# Altium PCB Morpheus_LED.PcbDoc
Units mm, origin at the board's own origin, x right, y up, seen from the top; angles counter-clockwise.
Board outline 53 x 53 mm, 4 copper layers (Component Side, Ground Plane, Power Plane, Solder Side), stack 0.575 mm thick; 57 components, 33 nets, 164 pads, 66 vias.
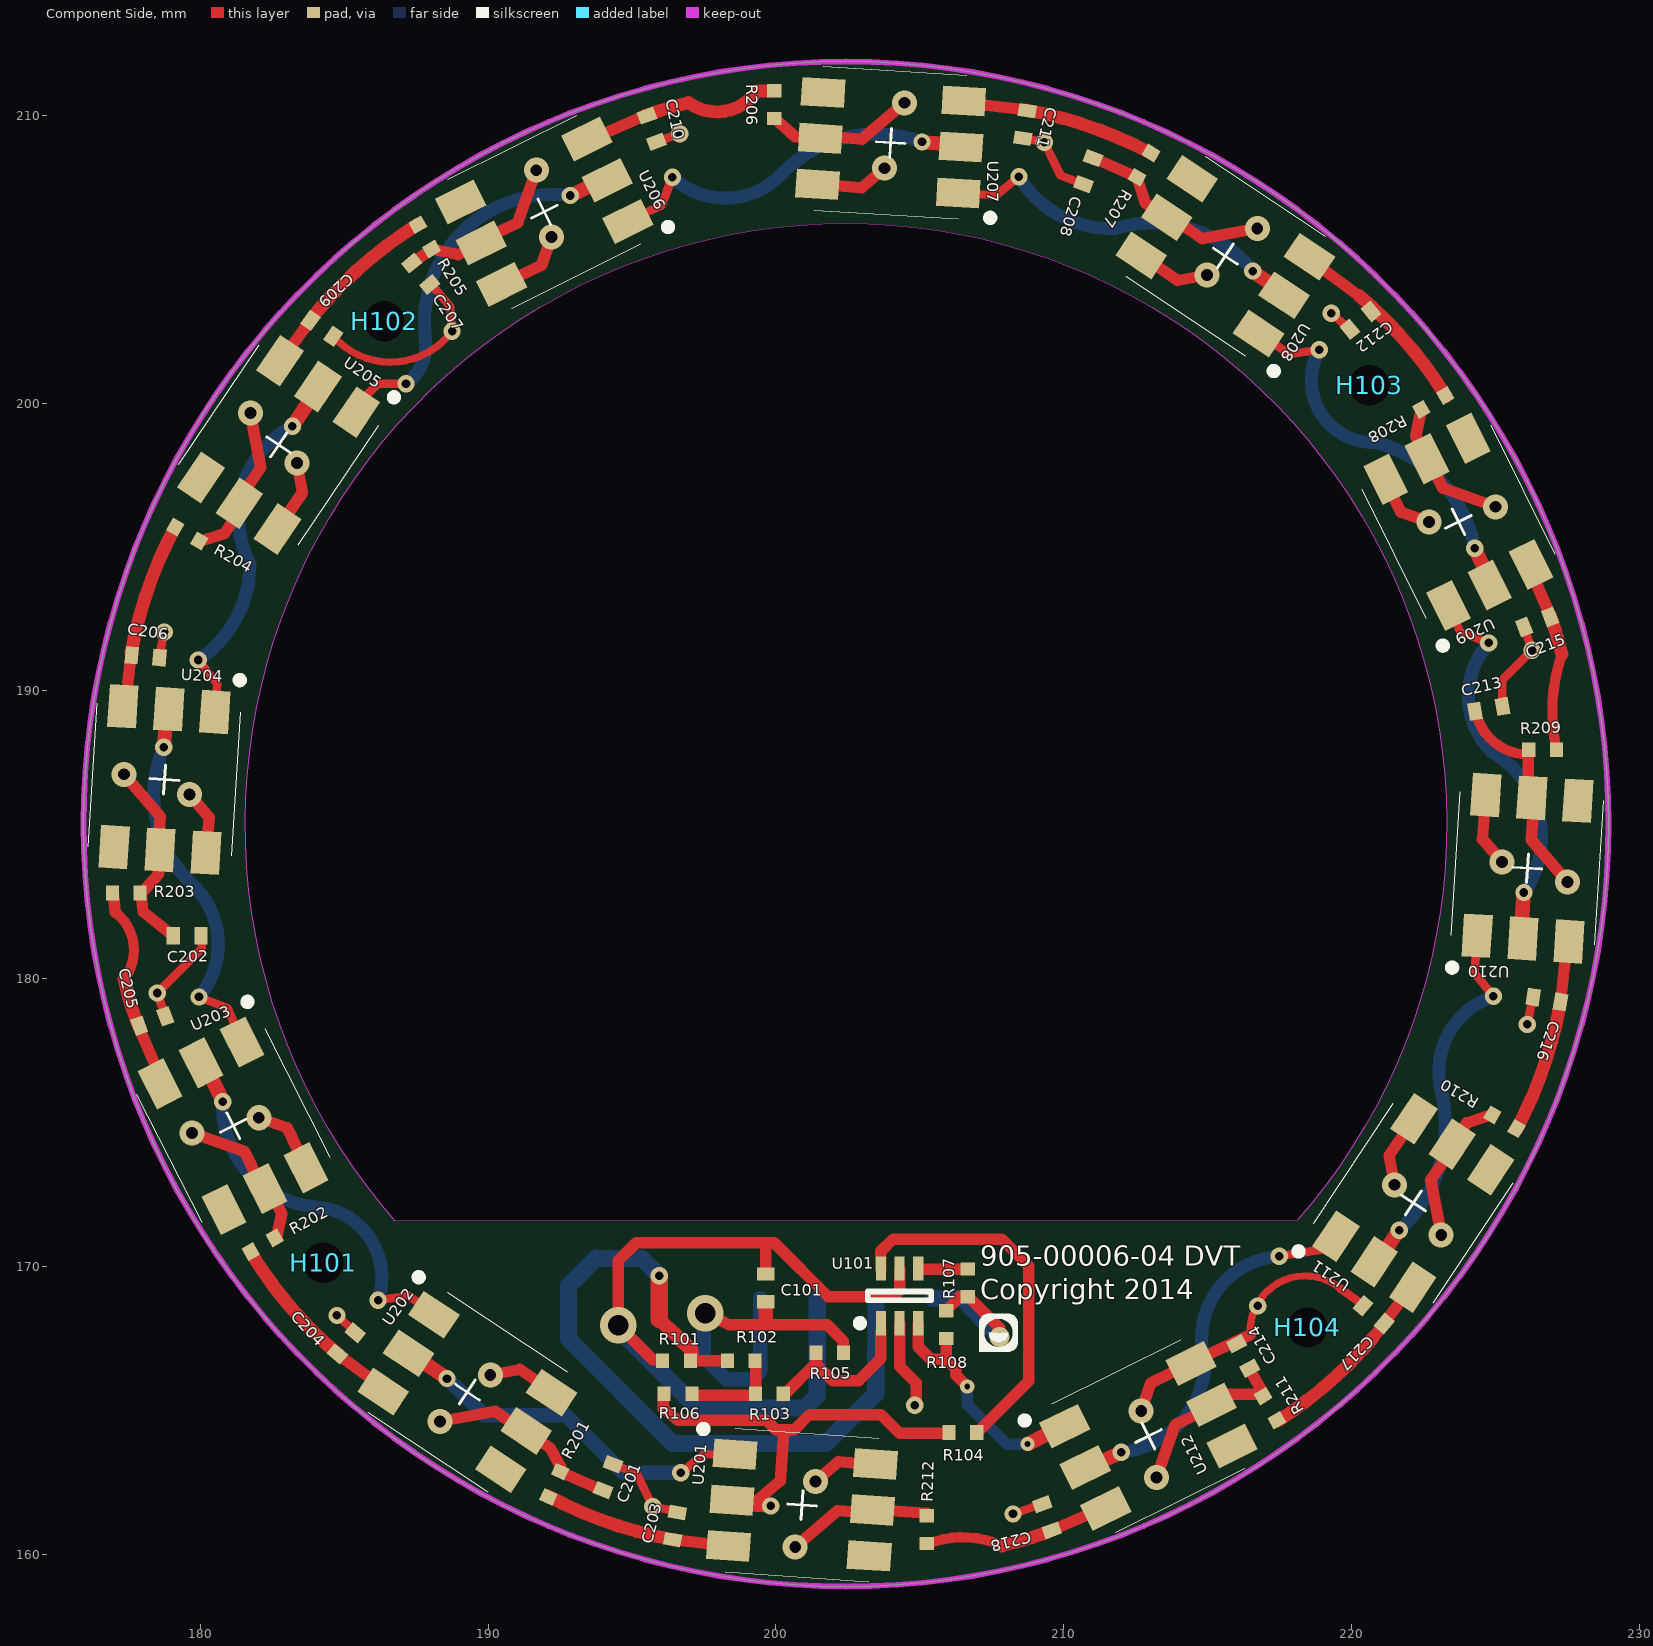
[diagram p0: Component Side view]
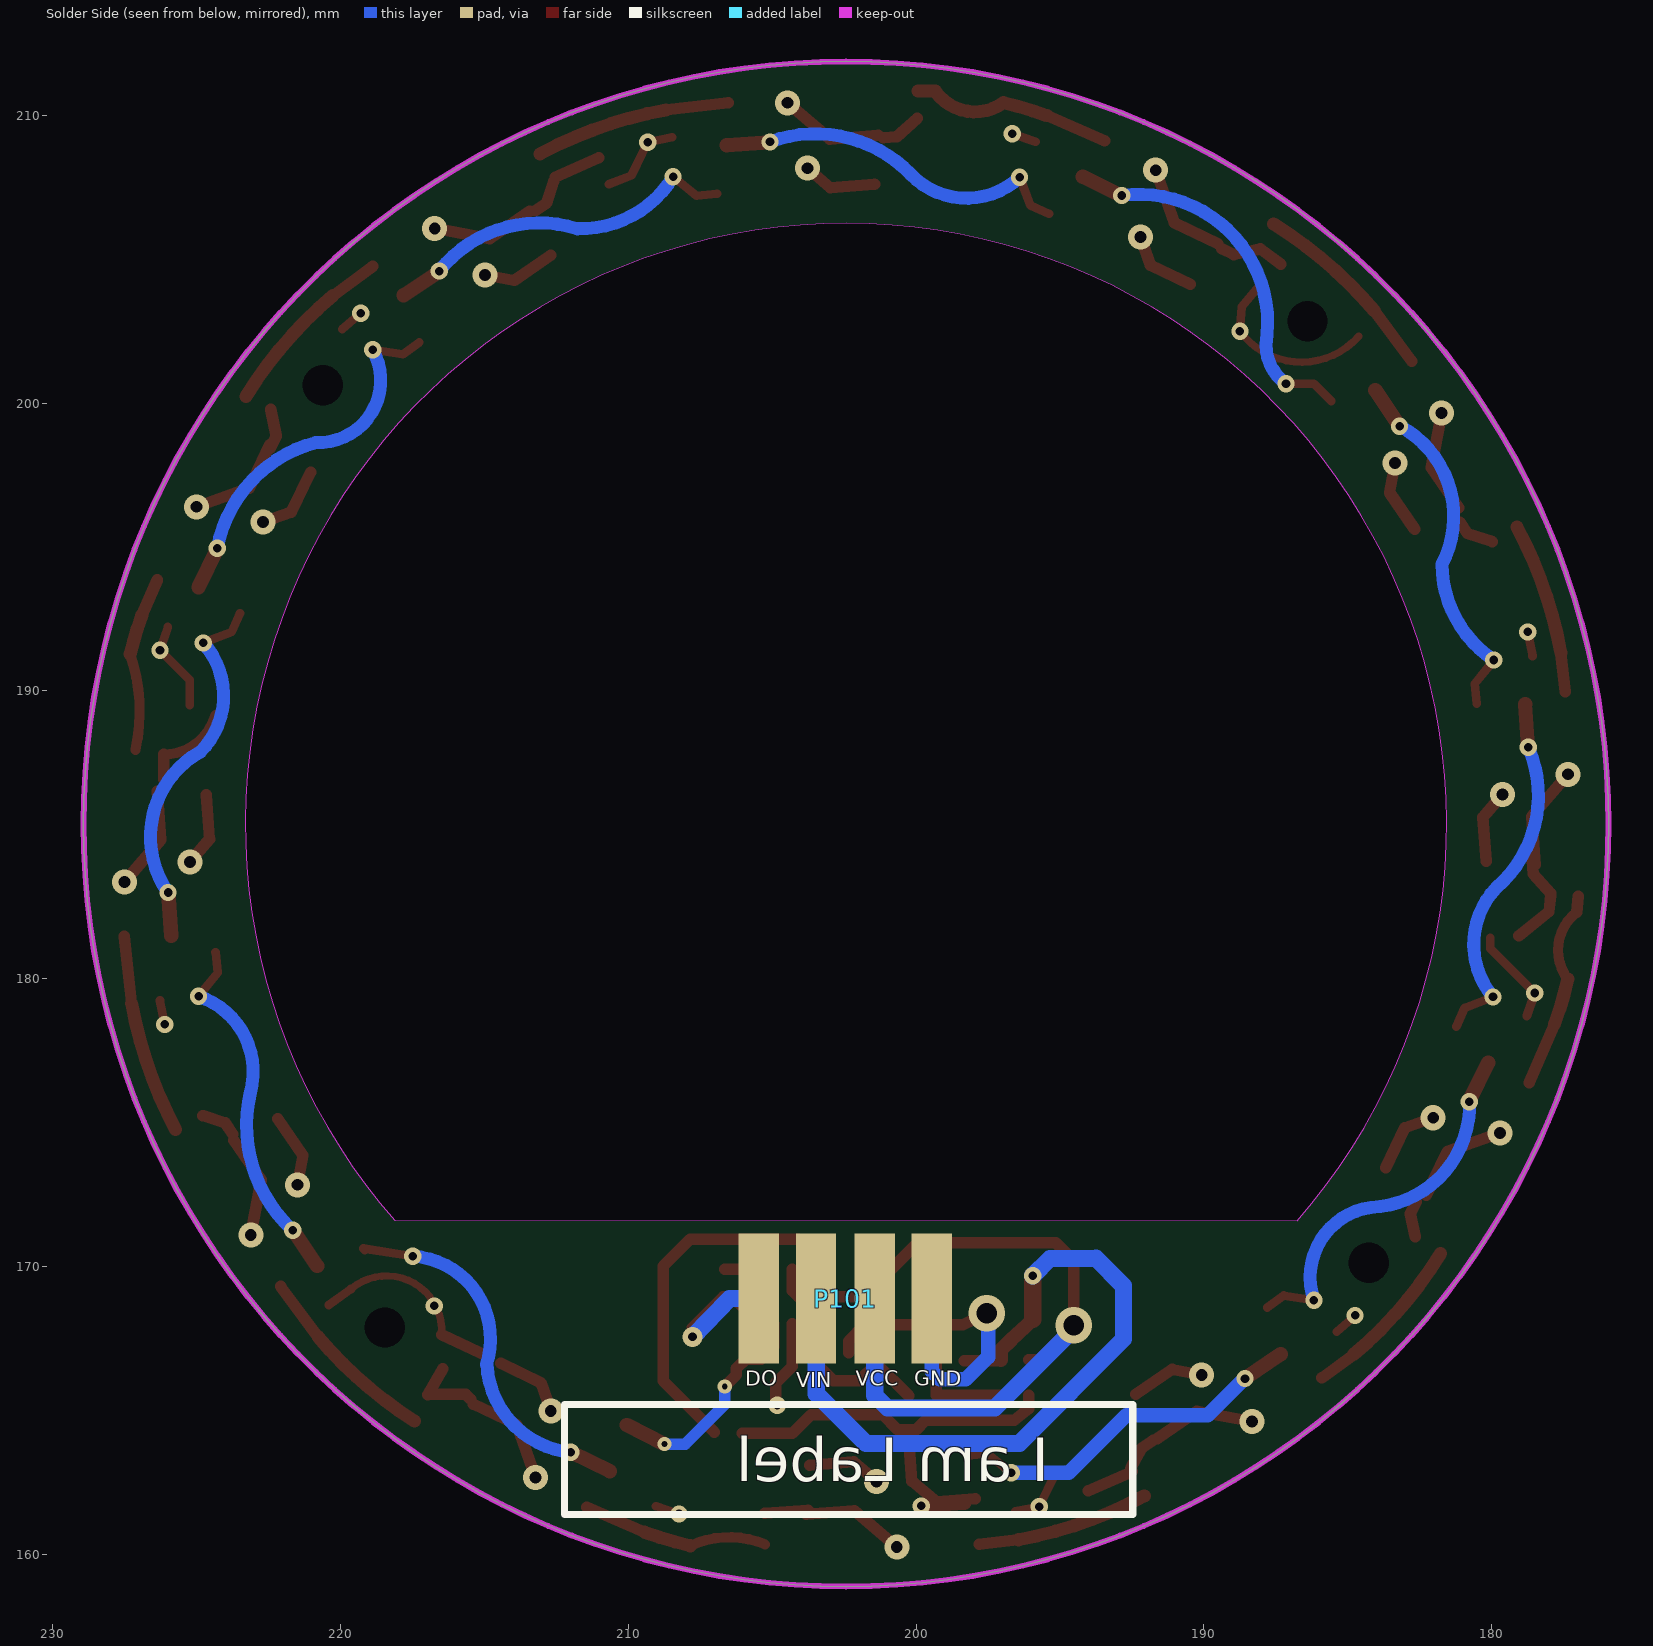
[diagram p1: Solder Side view, seen from below]
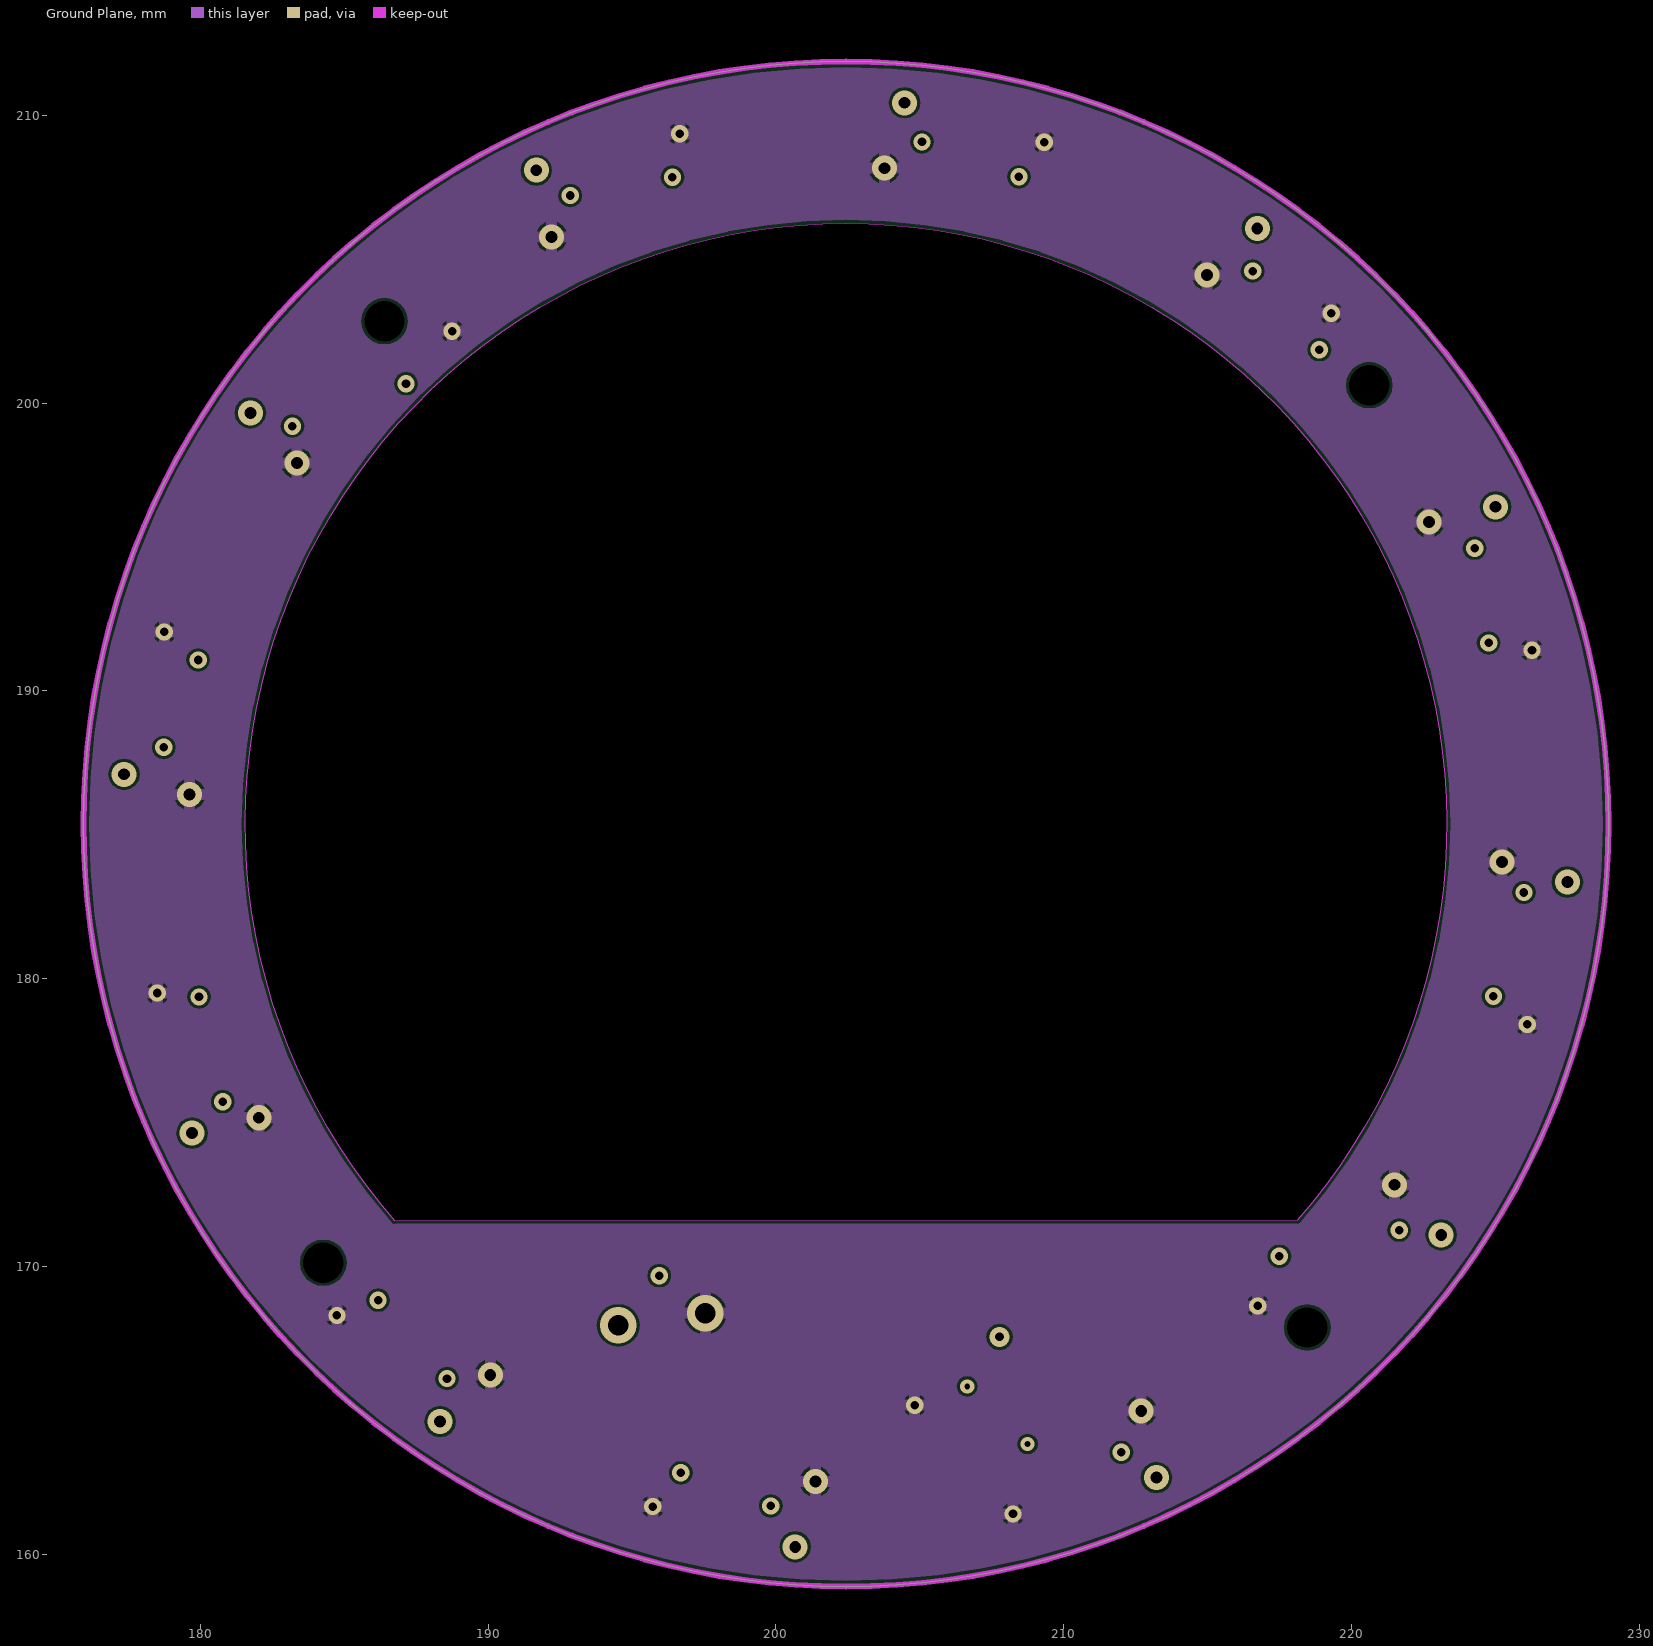
[diagram p2: Ground Plane]
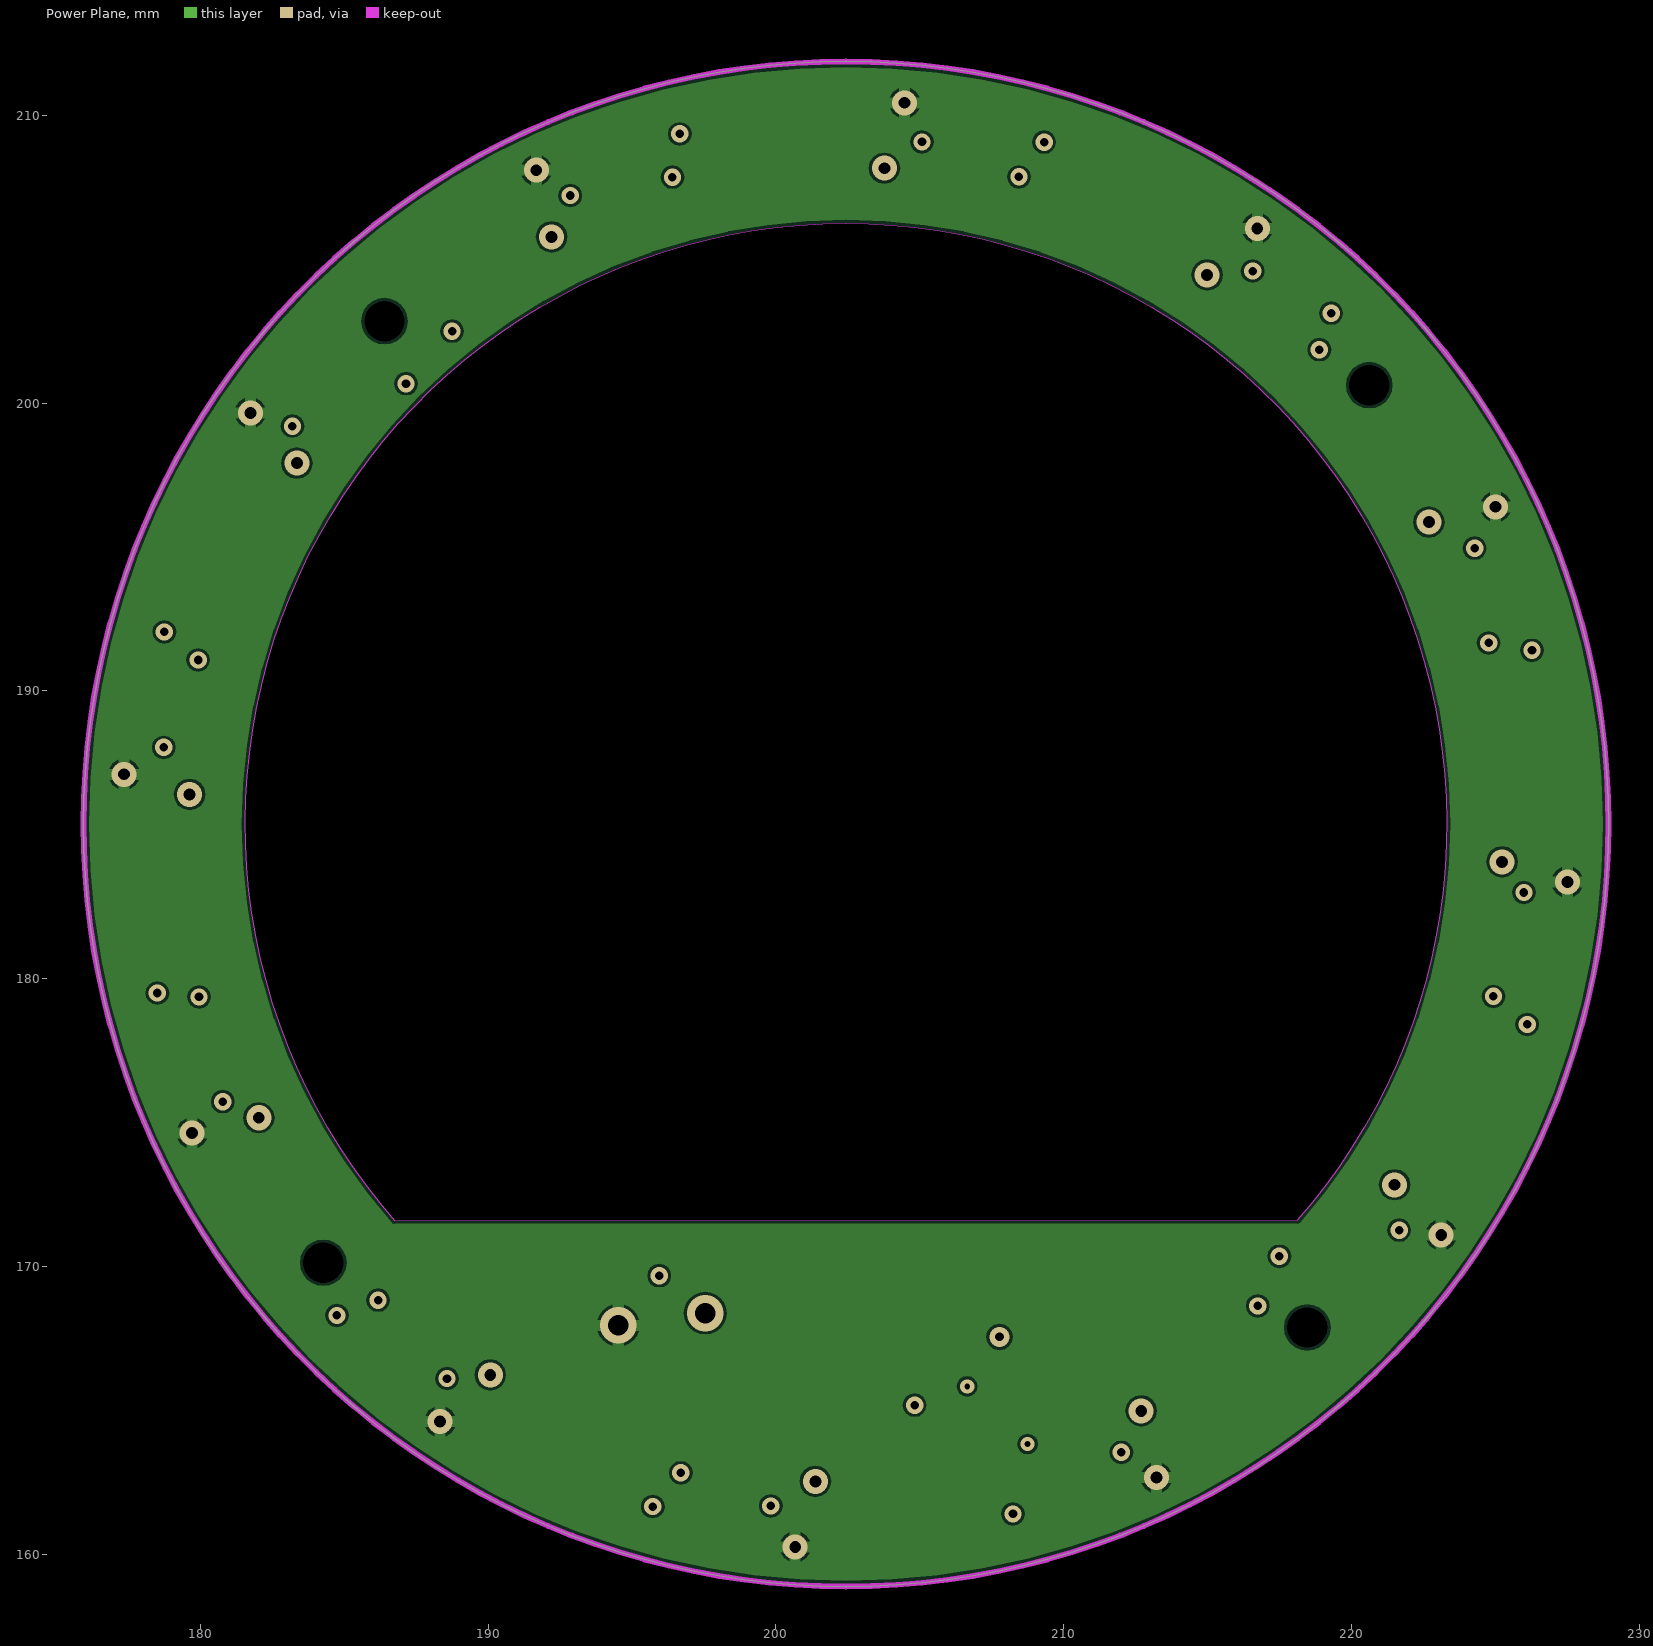
[diagram p3: Power Plane]

## Layer stack, top to bottom
Top Solder: solder mask 0.0102, Solder Resist, Dk 3.5
Component Side: signal copper 0.0356
Dielectric 1: core 0.1524, FR-4, Dk 4.8
Ground Plane: signal copper 0.036
Dielectric 2: prepreg 0.127, FR-4, Dk 4.8
Power Plane: signal copper 0.036
Dielectric 3: core 0.1524, FR-4, Dk 4.8
Solder Side: signal copper 0.0356
Bottom Solder: solder mask 0.0102, Solder Resist, Dk 3.5

## Board outline
175.94,185.373 ccw(c202.44,185.373) 202.44,158.873 ccw(c202.44,185.373) 228.94,185.373 ccw(c202.44,185.373) 202.44,211.873 ccw(c202.44,185.373)
cut-out: 186.765,171.587 cw(c202.44,185.373) 218.129,171.603

## Design rules (kind name [scope] priority, off if disabled: settings)
AssemblyTestpoint [(IsPad And (OnTopLayer Or OnBottomLayer))] p1: testpointundercomponent=FALSE minsize=0.3 maxsize=2.54 preferedsize=0.6 minholesize=0 maxholesize=1.016 preferedholesize=0 testpointgrid=0.025 usegrid=TRUE gridtolerance=0 allowsidetop=TRUE allowsidebottom=TRUE minspacing=1 compbodyclearance=1 boardedgeclearance=1
Clearance Clearance_1 [All] p1: gap=0.1
Clearance "Polygon to board edge" [All vs OnLayer('Keep-Out Layer')] p2: gap=0.5
DiffPairsRouting [All] p1: maxlimit=0.254 minlimit=0.15 mostfreqgap=0.254 toplayer_prefgap=0.15 toplayer_minwidth=0.15 toplayer_maxwidth=0.381 toplayer_prefwidth=0.15 midlayer1_minwidth=0.15 midlayer1_maxwidth=0.381 midlayer1_prefwidth=0.381 midlayer2_minwidth=0.15 midlayer2_maxwidth=0.381 midlayer2_prefwidth=0.381 bottomlayer_prefgap=0.15 bottomlayer_minwidth=0.15 bottomlayer_maxwidth=0.381 bottomlayer_prefwidth=0.15 maxuncoupledlength=12.7
FabricationTestpoint [(IsPad And (OnTopLayer Or OnBottomLayer))] p1: side=3 testpointundercomponent=TRUE minsize=0.3 maxsize=2.54 preferedsize=0.6 minholesize=0 maxholesize=1.016 preferedholesize=0 testpointgrid=0.025 allowsidetop=TRUE allowsidebottom=TRUE usegrid=TRUE gridtolerance=0 minspacing=1 compbodyclearance=1 boardedgeclearance=1
FanoutControl Fanout_Default [All] p5: bgadir=Out bgaviamode=Centered fanoutstyle=Staggered fanoutdirection=Alternating viagrid=0.025 // Fanout_Default (Default Rule)
HoleSize [All] p1 off: absolutevalues=TRUE maxlimit=5 minlimit=0.35 maxpercent=80.000 minpercent=20.000
MinimumSolderMaskSliver [All] p1 off: minsoldermaskwidth=0.2
PasteMaskExpansion [All] p1: expansion=-0.05
PolygonConnect "Polygon Connect Net Tie" [(InComponentClass('Net Tie'))] p1: connectstyle=Direct reliefconductorwidth=0.254 reliefentries=4 polygonreliefangle="90 Angle" airgapwidth=0.254
PolygonConnect [All] p2: connectstyle=Relief reliefconductorwidth=0.4 reliefentries=4 polygonreliefangle="90 Angle" airgapwidth=0.1
RoutingCorners [All] p1: cornerstyle=45-Degree minsetback=1 maxsetback=5
RoutingVias "Power VIas" [InNetClass('Power')] p1: holewidth=0.2 width=0.4 viastyle="Through Hole" minholewidth=0.2 minwidth=0.4 maxholewidth=1 maxwidth=1
RoutingVias [All] p2: holewidth=0.2 width=0.4 viastyle="Through Hole" minholewidth=0.2 minwidth=0.4 maxholewidth=1 maxwidth=1
ShortCircuit "ShortCircuit between AGND and GND" [(InNet('GND')) vs (InNet('AGND'))] p1: allowed=TRUE
ShortCircuit [All] p2: allowed=FALSE
SilkToSolderMaskClearance [IsPad] p1 off: minsilkscreentomaskgap=0 clearancetoexposedcopper=TRUE
SolderMaskExpansion [All] p1: expansion=0.07
Width "Power width" [InNetClass('Power')] p1: maxlimit=2 minlimit=0.2 preferedwidth=1
Width LED [InNetClass('LED')] p2: maxlimit=0.15 minlimit=0.15 preferedwidth=0.15
Width TP [InNetClass('TP')] p3: maxlimit=0.15 minlimit=0.15 preferedwidth=0.15
Width [All] p4: maxlimit=2 minlimit=0.15 preferedwidth=0.15
19 further rules are at their usual default settings.

## Classes and differential pairs
component class Morpheus_LED2: C201 C202 C203 C204 C205 C206 C207 C208 C209 C210 C211 C212 C213 C214 C215 C216 C217 C218 R201 R202 R203 R204 R205 R206 R207 R208 R209 R210 R211 R212 U201 U202 U203 U204 U205 U206 U207 U208 U209 U210 U211 U212
differential pair class COMM_LINES: COMM
component class Morpheus_LED1: C101 H101 H102 H103 H104 P101 R101 R102 R103 R104 R105 R106 R107 R108 U101

## Components (designator, comment, footprint, x,y, rotation, side; value= is the part's Value field where it differs from the comment)
C101 "DNP" CAP0402_SENSE_DVT 199.65,169.25 r270 top
C201 "4.7u" CAP0402_SENSE_DVT 194.175,162.675 r249 top
C202 "4.7u" CAP0402_SENSE_DVT 179.543,181.484 r180 top
C203 "0.1u" CAP0402_SENSE_DVT 196.5,160.975 r260 top
C204 "0.1u" CAP0402_SENSE_DVT 185.075,167.325 r230 top
C205 "0.1u" CAP0402_SENSE_DVT 178.325,178.525 r200 top
C206 "0.1u" CAP0402_SENSE_DVT 178.1,191.2 r175 top
C207 "4.7u" CAP0402_SENSE_DVT 187.66,204.496 r130 top
C208 "4.7u" CAP0402_SENSE_DVT 210.856,208.062 r70 top
C209 "0.1u" CAP0402_SENSE_DVT 184.225,202.6 r145 top
C210 "0.1u" CAP0402_SENSE_DVT 195.69,209.539 r110 top
C211 "0.1u" CAP0402_SENSE_DVT 208.664,209.685 r81 top
C212 "0.1u" CAP0402_SENSE_DVT 220.32,202.877 r40 top
C213 "4.7u" CAP0402_SENSE_DVT 224.775,189.375 r190 top
C214 "4.7u" CAP0402_SENSE_DVT 216.24,166.883 r298 top
C215 "0.1u" CAP0402_SENSE_DVT 226.458,192.393 r21 top
C216 "0.1u" CAP0402_SENSE_DVT 226.8,179.275 r350 top
C217 "0.1u" CAP0402_SENSE_DVT 220.775,168.325 r320 top
C218 "0.1u" CAP0402_SENSE_DVT 209.425,161.275 r290 top
H101 "DNP" HOLE_ROUND_1.4mm 184.275,170.125 r90 top
H102 "DNP" HOLE_ROUND_1.4mm 186.4,202.85 r90 top
H103 "DNP" HOLE_ROUND_1.4mm 220.625,200.625 r90 top
H104 "DNP" HOLE_ROUND_1.4mm 218.475,167.875 r90 top
P101 "DNP" mate_for_molex_47420-0001 199.45,167.775 r90 top
R101 "1.5k" RES0402_SENSE_DVT 196.55,166.725 r180 top
R102 "475" RES0402_SENSE_DVT 198.8,166.725 r180 top
R103 "DNP" RES0402_SENSE_DVT 199.775,165.575 r0 top
R104 "DNP" RES0402_SENSE_DVT 206.5,164.225 r180 top
R105 "DNP" RES0402_SENSE_DVT 201.875,167 r180 top
R106 "0" RES0402_SENSE_DVT 196.6,165.575 r180 top
R107 "DNP" RES0402_SENSE_DVT 206.675,169.425 r270 top
R108 "0" RES0402_SENSE_DVT 205.925,167.975 r90 top
R201 "150" RES0402_SENSE_DVT 192.3,162.425 r65 top
R202 "150" RES0402_SENSE_DVT 182.175,170.75 r30 top
R203 "150" RES0402_SENSE_DVT 177.425,182.975 r0 top
R204 "150" RES0402_SENSE_DVT 179.55,195.45 r330 top
R205 "150" RES0402_SENSE_DVT 187.8,205.775 r300 top
R206 "150" RES0402_SENSE_DVT 199.95,210.375 r270 top
R207 "150" RES0402_SENSE_DVT 212.8,208.275 r240 top
R208 "150" RES0402_SENSE_DVT 222.85,200.025 r210 top
R209 "150" RES0402_SENSE_DVT 226.65,187.95 r180 top
R210 "150" RES0402_SENSE_DVT 225.325,175.025 r150 top
R211 "150" RES0402_SENSE_DVT 217.175,165.075 r120 top
R212 "150" RES0402_SENSE_DVT 205.25,160.85 r90 top
U101 "DNP" SOT65P210X110-6N 204.3,168.975 r90 top
U201 "WS2812S" 6PIN_WS2812 200.916,161.704 r176 top
U202 "WS2812S" 6PIN_WS2812 189.28,165.631 r146.5 top
U203 "WS2812S" 6PIN_WS2812 181.143,174.887 r117 top
U204 "WS2812S" 6PIN_WS2812 178.754,186.92 r86.4 top
U205 "WS2812S" 6PIN_WS2812 182.725,198.55 r56 top
U206 "WS2812S" 6PIN_WS2812 191.953,206.653 r26.5 top
U207 "WS2812S" 6PIN_WS2812 203.993,209.052 r356.5 top
U208 "WS2812S" 6PIN_WS2812 215.624,205.109 r326.4 top
U209 "WS2812S" 6PIN_WS2812 223.722,195.874 r296.4 top
U210 "WS2812S" 6PIN_WS2812 226.123,183.837 r266.4 top
U211 "WS2812S" 6PIN_WS2812 222.159,172.201 r236.4 top
U212 "WS2812S" 6PIN_WS2812 212.949,164.103 r206.4 top

## Footprints (in the part's own frame and the unit in brackets; to place one, negate y for a bottom-side part, rotate by r counter-clockwise, add the part's x,y. Pads: shape width x height; smd on the part's side, far side on the other; paste and mask are expansions set on the pad)
6PIN_WS2812 [mm] "6-pin 5.4 x 5.4 x 1.5mm"
  rect 1.5x1 smd: 1(2.45,-1.6) 2(2.45,0) 3(2.45,1.6) 4(-2.45,1.6) 5(-2.45,0) 6(-2.45,-1.6)
  silkscreen extent -2.5,-2.52 3.74,2.5, body extent -2.51,-2.51 2.5,2.52, height 0.8
CAP0402_SENSE_DVT [mil] "Chip Capacitor, 2-Leads"
  rect 18x24 smd: 1(-19,0) 2(19,0)
  body extent -21,-11 21,11, height 22
HOLE_ROUND_1.4mm [mm]
  round 1.2 hole 1.4 unplated: 1(0,0)
mate_for_molex_47420-0001 [mm] "Molex 4-pin connector pads"
  rect 4.524x1.4 smd far side: 1(1.107,-0.006) 2(1.107,-1.988) 3(1.108,-4.032) 4(1.108,-6.018)
RES0402_SENSE_DVT [mil] "Chip resistor 0402"
  rect 18x20 smd: 1(-19,0) 2(19,0)
  body extent -24,-8 24,8, height 20
SOT65P210X110-6N [mm] "SOT23, 6-Leads, Body 2.00x2.10mm, Pitch 0.65mm, IPC Medium Density"
  rect 0.85x0.35 smd: 1(-0.95,0.65) 2(-0.95,0) 3(-0.95,-0.65) 4(0.95,-0.65) 5(0.95,0) 6(0.95,0.65)
  silkscreen extent -1.07,-1.1 0.15,1.5, body extent -0.68,-1.1 0.67,1.1, height 1.1

## Part data
C101 C203 C204 C205 C206 C209 C210 C211 C212 C215 C216 C217 C218: library part C_0.1u_10_50_X7R_0402, "Chip capacitor"
C201 C202 C207 C208 C213 C214: library part C_4.7u_10_10_JB_0402, "Chip capacitor"
H101 H102 H103 H104: library part Hole, "general purpose hole"
P101: library part mate_for_molex_47420-0001, "Molex 4-pin spring connector 1.8 mm working height"
R101 R105: library part R_1.5k_5_0.1_0402, "Chip Resistor"
R102: library part R_475_1_0.1_0402, "Chip Resistor"
R103 R106 R108: library part R_0_jumper_0.1_0402, "Chip Resistor"
R104 R107: library part R_100_1_0.1_0402, "Chip Resistor"
R201 R202 R203 R204 R205 R206 R207 R208 R209 R210 R211 R212: library part R_150_1_0.1_0402, "Chip Resistor"
U101: library part 74HCT2G04, "Dual inverter The 74HC2G04; 74HCT2G04 is a high-speed Si-gate CMOS device."
U201 U202 U203 U204 U205 U206 U207 U208 U209 U210 U211 U212: "WS2812S Intelligent control LED integrated light source"

## Via types
v1: diameter 0.6, hole 0.3, Component Side to Solder Side, tented both sides, 37 vias
v2: diameter 0.87, hole 0.411, Component Side to Solder Side, tented both sides, 24 vias
v3: diameter 0.5, hole 0.2, Component Side to Solder Side, tented both sides, 2 vias
v4: diameter 1.27, hole 0.711, Component Side to Solder Side, tented both sides, 2 vias
v5: diameter 0.7, hole 0.3, Component Side to Solder Side, tented both sides, 1 vias

## Nets (pads, with @x,y where several pads share a name; then routed paths per layer and width w, separated by ;. In a path a pad name is that pad's centre, name@x,y a point inside that pad or via, vN(x,y) a via of type N, cw(c..) or ccw(c..) an arc to the next point about the centre after c; other vN are vias at no path point)
1Y: R104.1 U101.6 | length 12.8
  Component Side w0.4: U101.6@203.65,169.9 203.65,170.525 204.075,170.95 207.85,170.95 208.8,170 208.8,166.025 R104.1@207.012,164.237
2Y: R107.1 U101.4 | length 1.6
  Component Side w0.4: U101.4@205.025,169.896 206.125,169.9 R107.1@206.649,169.907
5V: C101.1 C201.2 C202.2 C207.2 C208.2 C213.2 C214.2 P101.2 R101.2 R201.2 R202.2 R203.2 R204.2 R205.2 R206.2 R207.2 R208.2 R209.2 R210.2 R211.2 R212.2 U101.5 U201.5 U202.5 U203.5 U204.5 U205.5 U206.5 U207.5 U208.5 U209.5 U210.5 U211.5 U212.5 | length 97.8
  Component Side w0.354: C213.2@224.358,189.152 ccw(c226.15,189.65) R209.2@226.143,187.79
  Component Side w0.4: v2(177.35,187.1) 178.614,185.623 U204.5@178.484,183.95 ; R203.2@177.946,182.895 178.009,182.326 C202.2 ; R203.2@177.95,182.962 178.557,183.636 ; 178.555,183.636 U204.5@178.587,184.102 ; v2(179.713,174.633) 181.546,173.987 U203.5@182.271,172.473 ; R204.2@179.974,195.19 180.85,195.475 ; 180.848,195.476 U205.5@181.112,195.867 ; U205.5@181.147,196.366 182.096,197.75 v2(181.739,199.661) ; U203.5@182.624,172.244 182.829,171.824 ; R202.2@182.661,171.028 182.831,171.825 ; C207.2@187.325,204.825 R205.2 ; R205.2@188.16,205.333 188.958,205.164 ; v2(188.334,164.607) 190.244,164.963 U202.5@191.629,164.014 ; 188.957,205.166 U206.5@189.376,205.371 ; U206.5@189.516,205.538 191.03,206.262 v2(191.677,208.095) ; U202.5@191.762,163.959 192.15,163.7 192.552,162.974 R201.2@192.5,162.871 ; R201.2 C201.2@194.018,162.198 ; R101.2@196.092,166.75 195.725,166.75 v4(194.525,167.95) 194.525,170.2 195.15,170.825 199.942,170.825 201.817,168.95 202.333,168.95 ; C101.1 199.65,170.825 ; R206.2@199.958,209.901 200.68,209.251 ; v2(200.675,160.25) 202.152,161.514 U201.5@203.825,161.384 ; 200.68,209.254 U207.5@201.145,209.221 ; U207.5@201.325,209.305 202.998,209.175 v2(204.474,210.439) ; 202.35,168.95 204.1,168.95 204.3,169.15 U101.5@204.3,169.9 ; U201.5@203.761,161.532 R212.2@205.257,161.427 ; C208.2@211.033,208.521 R207.2@212.547,207.856 ; R207.2@212.597,207.714 212.849,206.939 ; 212.851,206.941 U208.5@213.238,206.68 ; v2(213.23,162.658) 213.876,164.491 U212.5@215.39,165.215 ; U208.5@213.439,206.667 214.824,205.718 v2(216.734,206.074) ; U212.5@215.487,165.381 215.657,165.55 R211.2@216.909,165.55 ; C214.2@216.449,166.447 R211.2@216.971,165.543 ; 222.237,198.856 R208.2@222.435,199.783 ; 222.24,198.857 U209.5@222.444,198.437 ; U209.5@222.46,198.558 223.184,197.044 v2(225.017,196.398) ; v2(223.124,171.091) 222.768,173.001 U211.5@223.717,174.386 ; U211.5@223.755,174.594 224.016,174.981 ; 224.014,174.983 R210.2@224.79,175.235 ; U210.5@226.143,186.929 R209.2@226.143,187.79 ; U210.5@226.38,186.508 226.25,184.834 v2(227.514,183.358)
  Solder Side w0.6: v4@194.475,167.875 197.275,165.075 201,165.075 201.438,165.513 P101.2
DI_201: R104.2 R106.2 U201.2 | length 16.8
  Component Side w0.4: R106.2@196.092,165.525 196.092,165.058 196.6,164.65 199.675,164.65 200,164.325 200.65,164.325 201.175,164.85 203.65,164.85 204.3,164.2 R104.2@206.05,164.2 ; U201.2@197.952,161.916 199.288,161.812 200.15,162.55 ; 200.15,162.525 200.28,164.198
  Component Side w0.5: U201.2@198.325,161.785 v1@199.827,161.685
  other v1: 199.826,161.674
DI_N: R103.2 R105.2 U101.1 | length 5.7
  Component Side w0.4: R103.2@200.258,165.5 201.379,166.621 ; R105.2 201.4,166.992 201.4,166.6 201.975,166.025 202.875,166.025 203.65,166.8 U101.1@203.65,167.725
DO_201: U201.1 U202.2 | length 12.8
  Component Side w0.3: v1@196.675,162.8 196.702,162.822 197.524,163.487 U201.1@198.228,163.413
  Component Side w0.5: U202.2@187.331,166.946 v1@188.581,166.109
  Solder Side w0.5: v1@188.582,166.11 189.867,164.825 192.7,164.825 194.7,162.825 v1(196.7,162.825)
  other v1: 188.575,166.1
DO_202: U202.1 U203.2 | length 13.2
  Component Side w0.3: v1@186.179,168.821 187.223,168.986 U202.1@187.796,168.57
  Component Side w0.5: U203.2@180.125,177.078 v1@180.789,175.728
  Solder Side w0.3: v1@180.75,175.75 v1@180.774,175.719
  Solder Side w0.454: v1@180.774,175.719 ccw(c184.322,175.597) 184.2,172.05 cw(c183.851,169.616) v1(186.179,168.824)
  other v1: 180.78,175.723
DO_203: U203.1 U204.2 | length 12.8
  Component Side w0.3: v1@179.955,179.36 180.942,178.981 U203.1@181.23,178.334
  Component Side w0.5: v1@178.741,188.036 U204.2@178.84,189.538
  Solder Side w0.454: v1@178.723,188.036 ccw(c182.614,186.361) 179.855,183.146 cw(c177.775,181.198) v1(179.956,179.363)
  other v1: 178.73,188.037
DO_204: U204.1 U205.2 | length 12.8
  Component Side w0.3: v1@179.922,191.073 180.587,190.251 U204.1@180.513,189.547
  Component Side w0.5: v1@183.209,199.194 U205.2@184.046,200.444
  Solder Side w0.454: v1(179.925,191.075) ccw(c177.712,194.428) 181.729,194.401 cw(c184.892,196.061) v1@183.194,199.203
  other v1: 183.2,199.2
DO_205: U205.1 U206.2 | length 13.3
  Component Side w0.3: U205.1@185.577,200.073 186.179,200.675 v1(187.15,200.675)
  Component Side w0.5: v1@192.86,207.205 U206.2@194.21,207.869
  Solder Side w0.454: v1(187.15,200.675) ccw(c186.148,202.051) 187.85,202.025 cw(c192.257,202.783) v1(192.856,207.215)
DO_206: U206.1 U207.2 | length 12.8
  Component Side w0.3: U206.1@195.377,206.579 196.024,206.867 v1@196.403,207.854
  Component Side w0.5: v1@205.08,209.068 U207.2@206.581,208.968
  Solder Side w0.454: v1(196.407,207.853) ccw(c198.247,209.802) 200.189,207.953 cw(c203.51,204.738) v1@205.08,209.086
  other v1: 205.081,209.079
DO_207: U207.1 U208.2 | length 12.6
  Component Side w0.3: U207.1@206.921,207.275 207.626,207.201 v1@208.447,207.867
  Component Side w0.5: v1@216.568,204.58 U208.2@217.819,203.743
  Solder Side w0.454: v1(208.449,207.864) ccw(c211.677,209.845) 211.776,206.06 cw(c213.106,201.818) v1@216.577,204.595
  other v1: 216.574,204.589
DO_208: U208.1 U209.2 | length 13.2
  Component Side w0.3: U208.1@217.272,202.111 217.845,201.695 v1@218.889,201.861
  Component Side w0.5: v1@224.279,194.954 U209.2@224.943,193.603
  Solder Side w0.454: v1(218.889,201.857) ccw(c220.775,200.794) 220.868,198.631 cw(c219.651,194.061) v1@224.294,194.962
  other v1: 224.288,194.958
DO_209: U209.1 U210.2 | length 13.1
  Component Side w0.3: U209.1@223.501,192.697 223.789,192.05 v1@224.776,191.671
  Component Side w0.5: U210.2@225.89,181.493 v1@225.99,182.994
  Solder Side w0.454: v1(224.774,191.668) ccw(c226.832,189.83) 224.875,187.885 cw(c223.226,184.927) v1@226.007,182.995
  other v1: 226.001,182.994
DO_210: U210.1 U211.2 | length 12.7
  Component Side w0.3: U210.1@224.351,180.911 224.277,180.207 v1@224.942,179.385
  Component Side w0.5: U211.2@220.818,170.013 v1@221.655,171.264
  Solder Side w0.454: v1@221.671,171.255 ccw(c218.309,174.904) 223.135,176.056 cw(c225.802,176.762) v1(224.939,179.383)
  other v1: 221.664,171.258
DO_211: U211.1 U212.2 | length 13.2
  Component Side w0.3: v1(217.5,170.35) 219.211,170.621 U211.1@219.161,170.553
  Component Side w0.5: U212.2@210.653,162.882 v1@212.004,163.546
  Solder Side w0.454: v1@211.998,163.533 ccw(c211.66,166.787) 214.924,166.576 ; 214.939,166.581 cw(c217.667,167.482) v1(217.5,170.35)
  other v1: 212.008,163.537
DO_212: R108.1 U101.3 U212.1 | length 8.7
  Component Side w0.4: U101.3@204.95,168 204.95,167.208 205.383,166.775 205.925,166.775 ; R108.1 205.925,166.775 ; v3(206.65,165.825) 206.25,166.225 206.25,166.45 205.925,166.775
  Component Side w0.5: v3@208.765,163.829 U212.1@210.055,164.487
  Solder Side w0.4: v3(206.65,165.825) 206.65,165.2 208.025,163.825 v3(208.75,163.825)
GND: C101.2 C201.1 C202.1 C203.1 C204.1 C205.1 C206.1 C207.1 C208.1 C209.1 C210.1 C211.1 C212.1 C213.1 C214.1 C215.1 C216.1 C217.1 C218.1 P101.1 R105.1 U101.2 U201.6 U202.6 U203.6 U204.6 U205.6 U206.6 U207.6 U208.6 U209.6 U210.6 U211.6 U212.6 | length 78.2
  Component Side w0.254: C209.1 ccw(c186.614,204.082) v1(188.75,202.5) ; 216.492,167.634 cw(c218.405,167.751) 219.644,169.214
  Component Side w0.3: v1@178.501,179.497 C205.1 ; v1@178.503,179.501 180.05,181.048 C202.1@180.05,181.411 ; C206.1@178.581,191.214 v1@178.744,192.051 ; v1@184.743,168.29 C204.1@185.387,167.73 ; C207.1@188.008,204.154 188.685,203.347 v1(188.75,202.5) ; C201.1@194.36,163.111 195.157,162.805 195.722,161.648 195.724,161.644 C203.1@196.561,161.481 ; C210.1 v1@196.661,209.364 ; v1@208.245,161.39 C218.1@209.052,161.668 ; C211.1@208.489,209.238 v1@209.327,209.075 ; v1@209.329,209.07 209.894,207.914 C208.1 ; v1@219.306,203.127 C212.1 ; 219.644,169.214 C217.1@220.413,168.655 ; C213.1@225.25,189.502 225.25,190.378 226.285,191.413 C215.1 ; v1@226.12,178.406 C216.1@226.283,179.244
  Component Side w0.4: v2(179.625,186.4) 180.303,185.608 U204.6@180.184,184.075 ; v2(182.034,175.165) 183.017,174.818 U203.6 ; U205.6 183.551,196.892 v2(183.36,197.917) ; v2(190.077,166.227) 191.102,166.418 U202.6@192.37,165.549 ; U206.6 191.861,204.791 v2(192.208,205.775) ; v4(197.55,168.375) 198.375,167.975 199.65,167.972 201.785,167.967 202.352,167.4 202.35,167.4 R105.1@202.35,167 ; v2(201.375,162.525) 202.167,163.203 U201.6@203.7,163.084 ; U207.6 202.982,207.486 v2(203.774,208.164) ; U101.2@204.3,168 204.3,166.525 204.875,165.95 204.875,165.225 v1(204.825,165.175) ; v2(212.698,164.978) 213.045,165.962 U212.6 ; U208.6 213.966,204.263 v2(214.991,204.454) ; U212.6@214.9,166.875 216.491,167.617 ; U209.6@221.05,197.6 221.713,196.213 v2(222.697,195.866) ; v2(221.504,172.834) 221.313,173.859 U211.6 ; U210.6 224.561,184.85 v2(225.239,184.058)
  Component Side w0.508: 199.65,168.025 C101.2@199.65,168.7
  Solder Side w0.508: v4(197.55,168.375) 197.5,168.325 197.5,166.85 198.275,166.075 199.173,166.075 199.456,166.358 P101.1
  other v1: 208.243,161.396 195.725,161.65 184.747,168.294 216.75,168.625 226.114,178.408 178.507,179.499 226.28,191.411 178.75,192.05 219.3,203.125 209.326,209.069 196.663,209.358
INNER: R102.1 R103.1 R106.1 | length 3.5
  Component Side w0.4: R106.1@197.058,165.525 199.3,165.525 R102.1@199.3,166.733
LED_RING_DI: P101.3 R101.1 R102.2 | length 26.5
  Component Side w0.4: R101.1@197.108,166.725 R102.2@198.325,166.725
  Component Side w0.5: 195.95,168.15 196.7,167.45 197.058,167.092 R101.1@197.058,166.75
  Component Side w0.6: 195.95,168.15 v1(195.95,169.675)
  Solder Side w0.6: v1(195.95,169.675) 195.352,170.275 193.753,170.279 192.8,169.329 192.796,167.478 196.409,163.85 201.741,163.84 203.476,165.568 P101.3
LED_RING_DO: P101.4 R107.2 R108.2 | length 5.7
  Component Side w0.4: R108.2@205.9,168.45 206.392,168.942 R107.2 ; R107.2@206.7,168.942 207.775,167.867 v5@207.775,167.525
  Solder Side w0.6: P101.4 206.485,168.883 v5(207.775,167.55)
VCC_201: C203.2 R201.1 U201.3 | length 6
  Component Side w0.4: C203.2@196.477,160.493 U201.3@197.809,160.343
  Component Side w0.454: R201.1@192.075,162.025 ccw(c199.131,175.215) C203.2@196.449,160.499
VCC_202: C204.2 R202.1 U202.3 | length 6
  Component Side w0.4: C204.2@184.82,166.916 U202.3@185.898,166.12
  Component Side w0.454: R202.1@181.773,170.444 ccw(c194.479,178.339) C204.2@184.798,166.935
VCC_203: C205.2 R203.1 U203.3 | length 7
  Component Side w0.354: 177.05,182.3 cw(c176.041,180.989) 177.351,179.98
  Component Side w0.4: R203.1@176.987,182.868 177.05,182.3 ; C205.2@177.825,178.391 U203.3@178.7,176.385
  Component Side w0.454: 177.352,179.98 ccw(c191.902,183.453) C205.2@177.816,178.417
VCC_204: C206.2 R204.1 U204.3 | length 6
  Component Side w0.4: U204.3@177.443,189.966 C206.2@177.593,191.298
  Component Side w0.454: C206.2@177.599,191.326 cw(c192.315,188.644) R204.1@179.125,195.7
VCC_205: C209.2 R205.1 U205.3 | length 6.8
  Component Side w0.4: U205.3@182.785,201.463 184.049,203.175
  Component Side w0.454: 184.068,203.196 cw(c195.471,193.515) R205.1@187.577,206.221
VCC_206: C210.2 R206.1 U206.3 | length 7
  Component Side w0.4: U206.3@193.456,209.121 C210.2@195.434,209.983
  Component Side w0.454: C210.2@195.461,209.993 cw(c200.496,195.907) 196.963,210.443 ccw(c197.953,211.815) 199.325,210.825 ; 199.324,210.846 cw(c199.701,195.892) R206.1@199.932,210.849
VCC_207: C211.2 R207.1 U207.3 | length 6.8
  Component Side w0.4: U207.3@206.529,210.437 C211.2@208.672,210.196
  Component Side w0.454: C211.2@208.7,210.19 cw(c206.018,195.474) R207.1@213.074,208.664
VCC_208: C212.2 R208.1 U208.3 | length 6.4
  Component Side w0.4: U208.3@218.879,204.756 220.323,203.69
  Component Side w0.454: 220.27,203.746 cw(c210.589,192.342) R208.1@223.295,200.237
VCC_209: C215.2 R209.1 U209.3 | length 6.1
  Component Side w0.354: R209.1 cw(c233.189,189.278) 227.324,191.287
  Component Side w0.4: U209.3@226.369,193.869 C215.2@226.905,192.64
  Component Side w0.454: C215.2@226.915,192.613 cw(c212.829,187.578) 227.321,191.286
VCC_210: C216.2 R210.1 U210.3 | length 7
  Component Side w0.4: C216.2@227.271,179.16 U210.3@227.531,181.466
  Component Side w0.454: R210.1@225.739,174.758 ccw(c212.549,181.814) C216.2@227.266,179.132
VCC_211: C217.2 R211.1 U211.3 | length 6.6
  Component Side w0.4: 220.815,167.577 U211.3@222.093,169.307
  Component Side w0.454: R211.1@217.437,164.625 ccw(c209.392,177.236) 220.796,167.555
VCC_212: C218.2 R212.1 U212.3 | length 6.5
  Component Side w0.354: R212.1@205.253,160.336 cw(c206.5,157.379) 207.854,160.289
  Component Side w0.4: C218.2@209.473,160.77 U212.3@211.444,161.63
  Component Side w0.454: 207.854,160.289 ccw(c204.41,174.847) C218.2@209.446,160.761
pads on no net: H101.1 H102.1 H103.1 H104.1 U201.4 U202.4 U203.4 U204.4 U205.4 U206.4 U207.4 U208.4 U209.4 U210.4 U211.4 U212.4

## Polygon pours and split planes (outlines as drawn)
GND on Ground Plane "Power Plane-No Net" (solid, pour order 2): 175.94,185.373 ccw(c202.44,185.373) 202.44,158.873 ccw(c202.44,185.373) 228.94,185.373 ccw(c202.44,185.373) 202.44,211.873 ccw(c202.44,185.373)
no net on Keep-Out Layer "Power Plane-No Net" (none): 175.94,185.373 ccw(c202.44,185.373) 202.44,158.873 ccw(c202.44,185.373) 228.94,185.373 ccw(c202.44,185.373) 202.44,211.873 ccw(c202.44,185.373)
5V on Power Plane "Power Plane-No Net" (solid, pour order 5): 175.94,185.373 ccw(c202.44,185.373) 202.44,158.873 ccw(c202.44,185.373) 228.94,185.373 ccw(c202.44,185.373) 202.44,211.873 ccw(c202.44,185.373)

## Keep-outs
Drill Drawing:
  circle w0.03: c186.409,202.855 r0.7
  circle w0.03: c220.613,200.615 r0.7
  circle w0.03: c218.475,167.875 r0.7
  circle w0.03: c184.275,170.125 r0.7
  circle w0.013: c202.44,185.373 r26.5
  lines w0.03: 217.43,171.587 217.835,171.587 218.638,171.587

## Other copper
Ground Plane:
  pour cut-out: 218.414,167.171 cw(c218.475,167.869) 217.778,167.93 cw(c218.475,167.869) 218.536,168.566 cw(c218.475,167.869) 219.172,167.808 cw(c218.475,167.869)
  pour cut-out: 186.36,202.162 cw(c186.421,202.859) 185.724,202.92 cw(c186.421,202.859) 186.482,203.557 cw(c186.421,202.859) 187.118,202.798 cw(c186.421,202.859)
Multi-Layer:
  pour cut-out: 186.765,171.587 cw(c202.44,185.373) 218.129,171.603

## Silkscreen, mask and mechanical layers (free items; w line width, h text height)
Top Overlay:
  region: 207.075,167.025 207.075,168.024 cw(c207.408,168.024) 207.408,168.356 208.074,168.356 cw(c208.074,168.024) 208.406,168.024 208.406,167.358 cw(c208.074,167.358) 208.074,167.025 207.075,167.025 207.741,167.194 cw(c207.741,167.691) 207.244,167.691 cw(c207.741,167.691) 207.741,168.187 cw(c207.741,167.691) 208.237,167.691 cw(c207.741,167.691) 207.741,167.194
  region: 208.073,167.691 207.408,167.691 ccw(c207.741,167.691) 207.741,167.358 ccw(c207.741,167.691) 208.073,167.691
  text "905-00006-04 DVT" at 207.1,170.025 h0.7
  text "Copyright 2014" at 207.107,168.857 h0.7
Bottom Overlay:
  lines w0.254: 192.475,161.375 212.225,161.375 212.225,165.2 192.475,165.2 192.475,161.375
  text "GND" at 200.072,165.85 h0.52
  text "VCC" at 202.097,165.85 h0.52
  text "DO" at 205.95,165.85 h0.52
  text "VIN" at 204.175,165.8 h0.52
  text "I am Label" at 195.375,162.525 h1.52
Mechanical 3:
  drawing of 2684 lines, arcs and shapes, not listed
Drill Drawing:
  drawing of 2332 lines, arcs and shapes, not listed
  text "5" at 269.334,327.709 h2.38
  text "6" at 219.042,327.696 h2.38
  text "2" at 419.76,327.682 h2.38
  text "4" at 319.768,327.668 h2.38
  text "8" at 117.706,327.562 h2.38
  text "1" at 471.231,327.526 h2.38
  text "3" at 369.766,327.512 h2.38
  text "7" at 169.57,327.49 h2.38
  text "Fabrication / Assembly Notes" at 125.203,319.216 h1.52
  text "1. Material: Rigid FR-4, RoHS compliant: material should meet or exceed requirements of IPC 4101/129" at 125.303,315.941 h1.52
  text "2. Number of electrical layers: 4" at 125.056,312.603 h1.52
  text "3. Trace / Space minimum: 5mil (all layers)" at 125.128,308.891 h1.52
  text "4. Thickness: 0.595 mm (finished)" at 125.106,305.278 h1.52
  text "5. Finish:  ENIG plating on exposed copper" at 125.281,301.453 h1.52
  text "6. Soldermask: per IPC-SM-840, color \"matte black\" registration within +/- 50um of circuit layer" at 125.481,297.728 h1.52
  text "7. Silkscreen: do printed silkscreen, white, on top and bottom layers" at 125.478,293.791 h1.52
  text "D" at 498.255,293.514 h2.38
  text "D" at 90.262,292.664 h2.38
  text "8. All vias are tented" at 125.428,289.916 h1.52
  text "9. Board must be lead free process compatible." at 125.556,286.203 h1.52
  text "Layer" at 310.003,284.015 h1.52
  text "Name" at 320.415,284.015 h1.52
  text "Material" at 344.284,284.015 h1.52
  text "Thickness" at 366.122,284.015 h1.52
  text "Constant" at 382.628,284.015 h1.52
  text "Board Layer Stack" at 397.103,284.015 h1.52
  text "10. mousebites shall be no larger than 0.05 mm" at 125.328,282.016 h1.52
  text "1" at 310.003,280.967 h1.52
  text "Top Paste" at 320.415,280.967 h1.52
  text "2" at 310.003,277.919 h1.52
  text "Top Overlay" at 320.415,277.919 h1.52
  text "11. All Test/QA/QC markings to be made on back side of PCB" at 124.953,277.016 h1.52
  text "3" at 310.003,274.871 h1.52
  text "Top Solder" at 320.415,274.871 h1.52
  text "Solder Resist" at 344.284,274.871 h1.52
  text "0.010mm" at 366.122,274.871 h1.52
  text "3.5" at 382.628,274.871 h1.52
  text "12. LED IC Pin #1 is noted as the triangular edge" at 125.453,271.866 h1.52
  text "4" at 310.003,271.823 h1.52
  text "Component Side" at 320.415,271.823 h1.52
  text "Copper" at 344.284,271.823 h1.52
  text "0.036mm" at 366.122,271.823 h1.52
  text "5" at 310.003,268.775 h1.52
  text "Dielectric 1" at 320.415,268.775 h1.52
  text "FR-4" at 344.284,268.775 h1.52
  text "0.152mm" at 366.122,268.775 h1.52
  text "4.8" at 382.628,268.775 h1.52
  text "13. IMPORTANT! Please follow the LOW temperature reflow process as" at 124.803,265.791 h2.52
  text "6" at 310.003,265.727 h1.52
  text "Ground Plane" at 320.415,265.727 h1.52
  text "Copper" at 344.284,265.727 h1.52
  text "0.036mm" at 366.122,265.727 h1.52
  text "7" at 310.003,262.679 h1.52
  text "Dielectric 2" at 320.415,262.679 h1.52
  text "FR-4" at 344.284,262.679 h1.52
  text "0.127mm" at 366.122,262.679 h1.52
  text "4.8" at 382.628,262.679 h1.52
  text "specified by World-Semi Documentation" at 134.203,260.591 h2.52
  text "8" at 310.003,259.631 h1.52
  text "Power Plane" at 320.415,259.631 h1.52
  text "Copper" at 344.284,259.631 h1.52
  text "0.036mm" at 366.122,259.631 h1.52
  text "9" at 310.003,256.583 h1.52
  text "Dielectric 3" at 320.415,256.583 h1.52
  text "FR-4" at 344.284,256.583 h1.52
  text "0.152mm" at 366.122,256.583 h1.52
  text "4.8" at 382.628,256.583 h1.52
  text "https://www.dropbox.com/s/wnyal9r8ml1h7r3/WS2812S%28B%29%20Using%20Instructions.pdf?dl=0" at 125.875,256.046 h1.52
  text "10" at 310.003,253.535 h1.52
  text "Solder Side" at 320.415,253.535 h1.52
  text "Copper" at 344.284,253.535 h1.52
  text "0.036mm" at 366.122,253.535 h1.52
  text "Contact Ben Peng for more detail- ben@sayhello.com" at 125.315,252.684 h1.52
  text "11" at 310.003,250.487 h1.52
  text "Bottom Solder" at 320.415,250.487 h1.52
  text "Solder Resist" at 344.284,250.487 h1.52
  text "0.010mm" at 366.122,250.487 h1.52
  text "3.5" at 382.628,250.487 h1.52
  text "12" at 310.003,247.439 h1.52
  text "Bottom Overlay" at 320.415,247.439 h1.52
  text "13" at 310.003,244.391 h1.52
  text "Bottom Paste" at 320.415,244.391 h1.52
  text "41.75" at 187.037,242.671 h2.17
  text "+/-0.05" at 200.618,242.671 h2.17
  text "Symbol" at 311.167,235.699 h1.83
  text "Hit Count" at 324.016,235.699 h1.83
  text "Finished Hole Size" at 341.741,235.699 h1.83
  text "Hole Type" at 375.919,235.699 h1.83
  text "Plated" at 394.558,235.699 h1.83
  text "2" at 324.016,231.889 h1.52
  text "0.200mm (7.87mil)" at 341.741,231.889 h1.52
  text "Round" at 375.919,231.889 h1.52
  text "PTH" at 394.558,231.889 h1.52
  text "16.04" at 156.814,229.423 h2.17
  text "+/-0.03" at 167.371,229.423 h2.17
  text "18.18" at 228.398,229.423 h2.17
  text "+/-0.03" at 238.954,229.423 h2.17
  text "38" at 324.016,228.079 h1.52
  text "0.300mm (11.81mil)" at 341.741,228.079 h1.52
  text "Round" at 375.919,228.079 h1.52
  text "PTH" at 394.558,228.079 h1.52
  text "C" at 90.229,227.965 h2.38
  text "C" at 497.743,227.831 h2.38
  text "24" at 324.016,224.269 h1.52
  text "0.411mm (16.18mil)" at 341.741,224.269 h1.52
  text "Round" at 375.919,224.269 h1.52
  text "PTH" at 394.558,224.269 h1.52
  text "2" at 324.016,220.459 h1.52
  text "0.711mm (28.00mil)" at 341.741,220.459 h1.52
  text "Round" at 375.919,220.459 h1.52
  text "PTH" at 394.558,220.459 h1.52
  text "15.25" at 245.293,219.015 h2.17
  text "+/-0.03" at 255.85,219.015 h2.17
  text "4" at 324.016,216.649 h1.52
  text "1.400mm (55.12mil)" at 341.741,216.649 h1.52
  text "Round" at 375.919,216.649 h1.52
  text "NPTH" at 394.558,216.649 h1.52
  text "17.48" at 135.169,212.868 h2.17
  text "+/-0.03" at 145.726,212.868 h2.17
  text "70 Total" at 324.016,212.839 h1.52
  text "*" at 197.55,210.8 h1.52
  text "* = mousebite locations" at 123.447,195.536 h1.52
  text "*" at 227.825,188.575 h1.52
  text "*" at 175.875,180.45 h1.52
  text "15.25" at 126.477,164.918 h2.17
  text "+/-0.03" at 137.034,164.918 h2.17
  text "B" at 90.205,164.031 h2.38
  text "B" at 498.767,163.671 h2.38
  text "*" at 205.975,158.75 h1.52
  text "17.50" at 245.293,154.121 h2.17
  text "+/-0.03" at 255.85,154.121 h2.17
  text "18.17" at 146.345,148.938 h2.17
  text "+/-0.03" at 156.902,148.938 h2.17
  text "16.03" at 221.916,148.938 h2.17
  text "+/-0.03" at 232.473,148.938 h2.17
  text "53" at 188.619,130.584 h2.17
  text "+/-0.05" at 196.335,130.584 h2.17
  text "DATE" at 406.2,110.52 h1
  text "DRAFTER" at 383.95,110.22 h1
  text "METRIC" at 357.825,109.645 h1.78
  text "DIMENSIONS ARE IN MILLIMETERS" at 348.653,106.619 h1
  text "TOLERANCES:" at 348.653,104.149 h1
  text "DESIGNER" at 383.8,103.57 h1
  text "DATE" at 406.35,103.42 h1
  text "0.05" at 369.903,101.449 h1.5
  text "0 > - < 2" at 352.486,101.342 h1.5
  text "Peng" at 383.65,99.82 h2.54
  text "2 > - < 10" at 352.414,98.536 h1.5
  text "0.08" at 369.903,98.536 h1.5
  text "TITLE:" at 427.175,98.395 h2.54
  text "A" at 90.196,97.041 h2.38
  text "10 > - < 50" at 351.305,95.512 h1.5
  text "0.10" at 369.903,95.512 h1.5
  text "PROPRIETARY AND CONFIDENTIAL" at 383.9,94.67 h1.5
  text "50 > - < 100" at 351.379,92.541 h1.5
  text "0.15" at 369.903,92.541 h1.5
  text "Morpheus LED Board" at 427.275,92.195 h2.54
  text "THE INFORMATION CONTAINED IN" at 384.032,90.282 h1.5
  text "100 > - < 200" at 350.27,89.463 h1.5
  text "0.20" at 369.903,89.463 h1.5
  text "THIS DRAWING IS THE SOLE" at 384.032,87.532 h1.5
  text "200 > -" at 350.27,86.018 h1.5
  text "0.20" at 369.903,86.018 h1.5
  text "PROPERTY OF HELLO INC." at 384.032,84.782 h1.5
  text "ANGLES" at 352.475,81.454 h1.5
  text "1.00" at 369.903,81.431 h1.5
  text "ANY REPRODUCTION IN PART OR" at 384.032,79.282 h1.5
  text "DWG.  NO." at 437.55,77.22 h2.54
  text "SIZE" at 425.75,77.02 h2.54
  text "REV" at 483.5,76.92 h2.54
  text "AS A WHOLEWITHOUT THE" at 384.032,76.532 h1.5
  text "WRITTEN PERMISSION OF HELLO" at 384.032,73.782 h1.5
  text "INC IS PROHIBITED." at 384.032,71.032 h1.5
  text "B" at 427.575,69.395 h6.35
  text "SCALE: 1:1" at 426.25,63.595 h2.04
  text "SHEET 1 OF 1" at 471.5,63.595 h2.04
  text "WEIGHT:" at 447.5,63.395 h2.04
  text "4" at 317.617,58.063 h2.38
  text "7" at 169.384,57.874 h2.38
  text "6" at 219.203,57.884 h2.38
  text "8" at 117.805,57.866 h2.38
  text "2" at 418.173,57.853 h2.38
  text "3" at 368.046,57.832 h2.38
  text "5" at 269.147,57.806 h2.38
  text "1" at 470.396,57.572 h2.38